# Altium PCB HARSH_Payload.PcbDoc (part 1 of 2)
Units mil, origin at the board's own origin, x right, y up, seen from the top; angles counter-clockwise.
Board outline 2500 x 1712.6 mil, 6 copper layers (Top-Outer-Layer (GND), Top-Mid-Layer Signal, Inner-Layer (GND), Inner-Layer (VCC), Bottom-Mid-Layer Signal, Bottom-Outer-Layer (GND)), stack 62.896 mil thick; 77 components, 30 nets, 807 pads, 301 vias.
Unrouted connection lines stored in the file: 3.
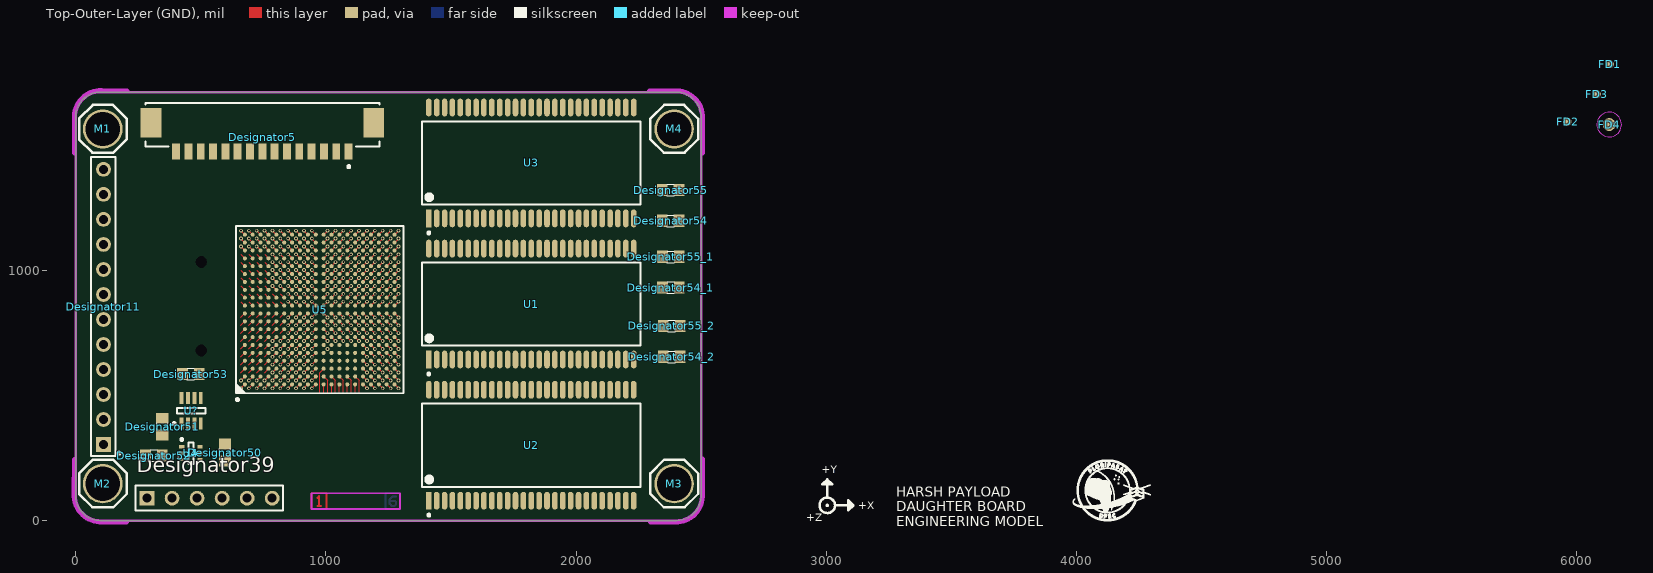
[diagram p0: Top-Outer-Layer (GND) view]
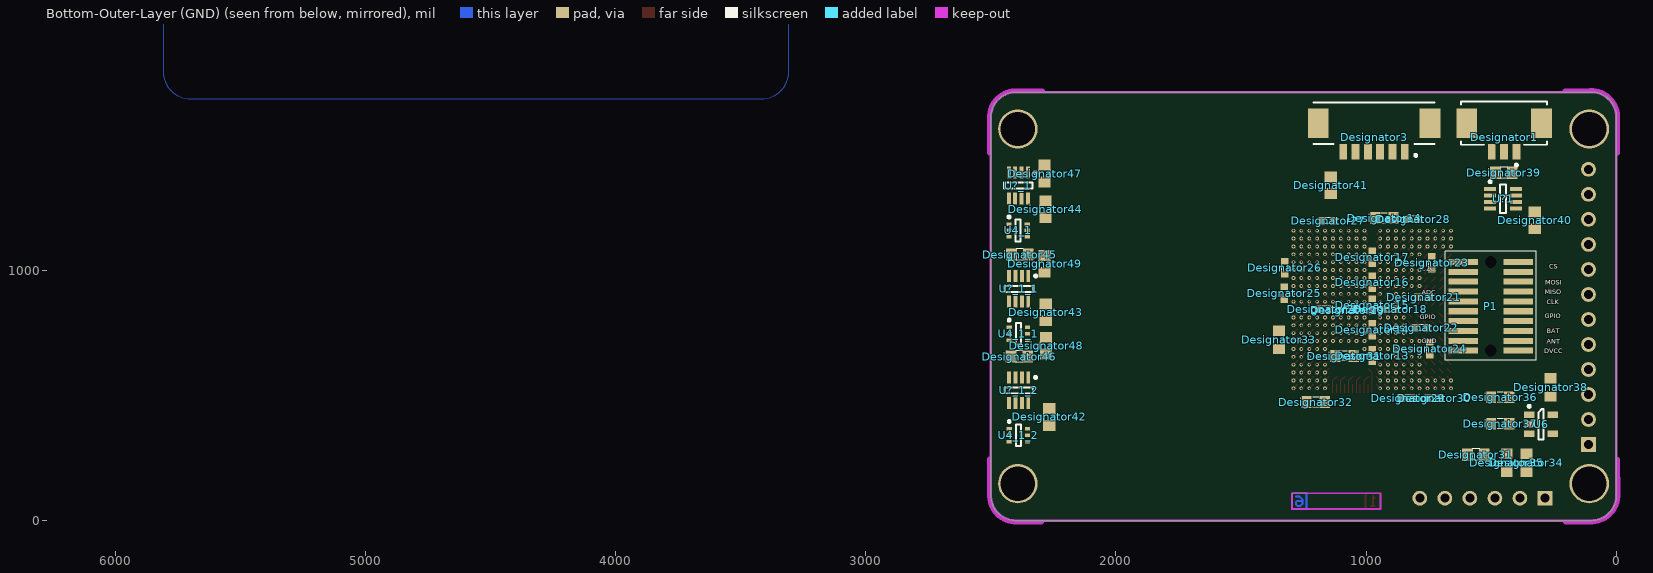
[diagram p1: Bottom-Outer-Layer (GND) view, seen from below]
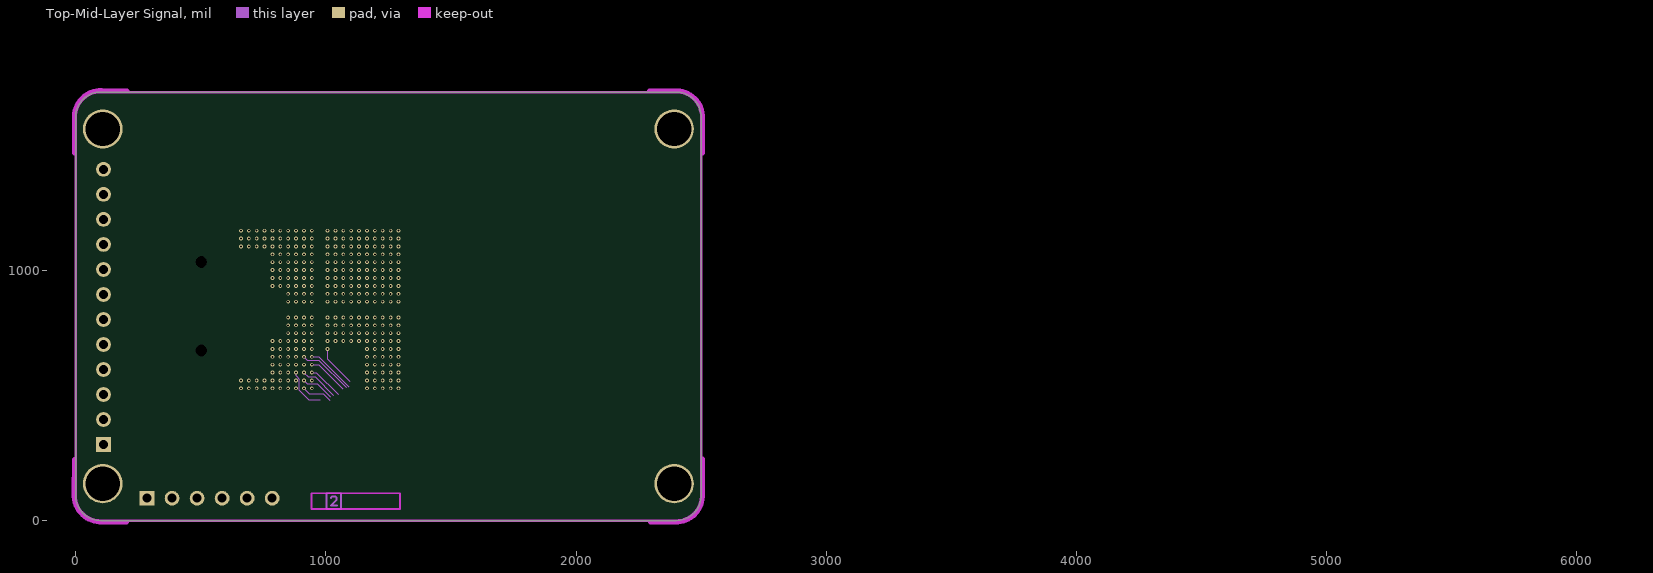
[diagram p2: Top-Mid-Layer Signal]
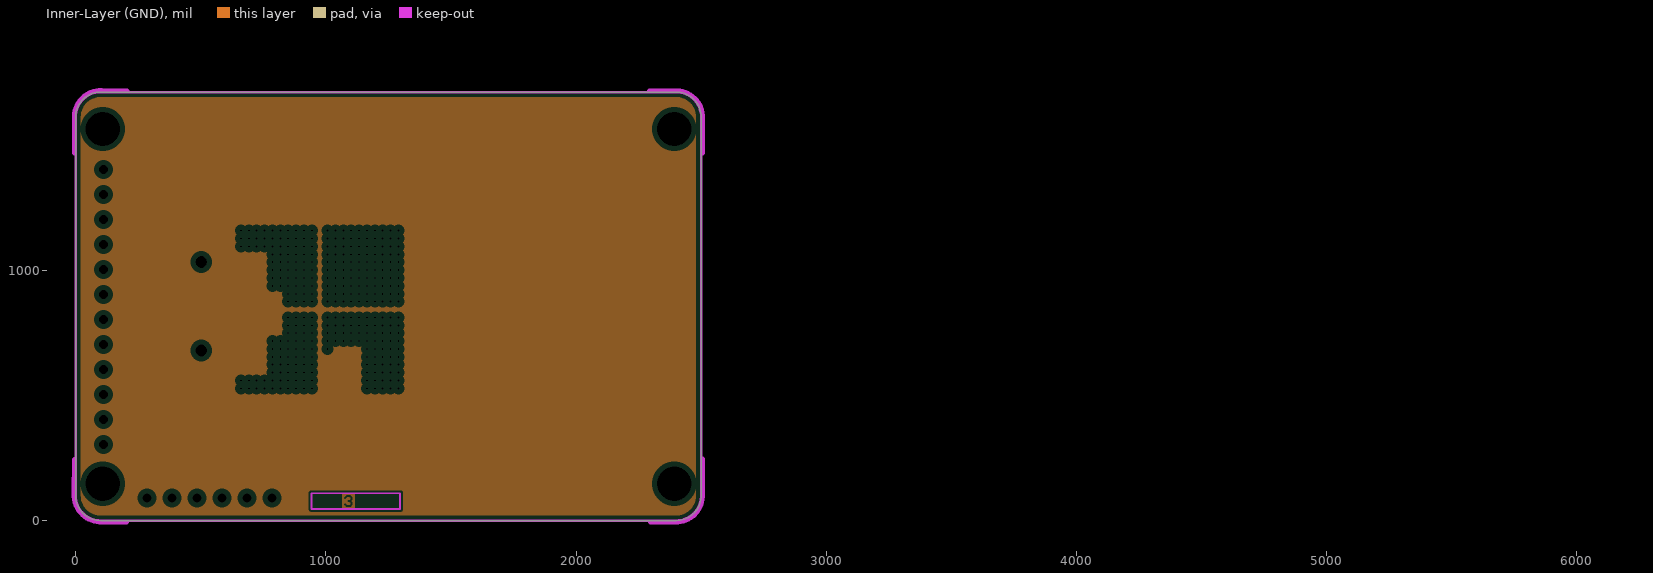
[diagram p3: Inner-Layer (GND), clearances drawn from the general rule]
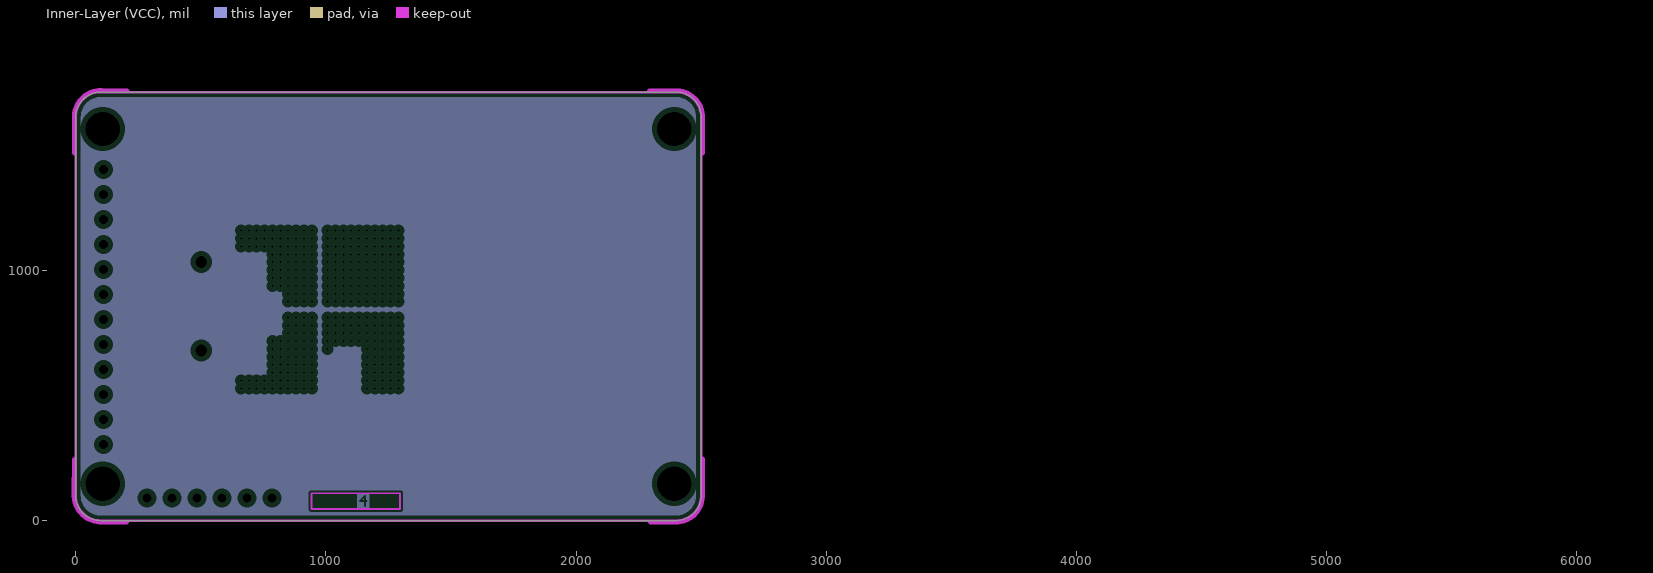
[diagram p4: Inner-Layer (VCC), clearances drawn from the general rule]
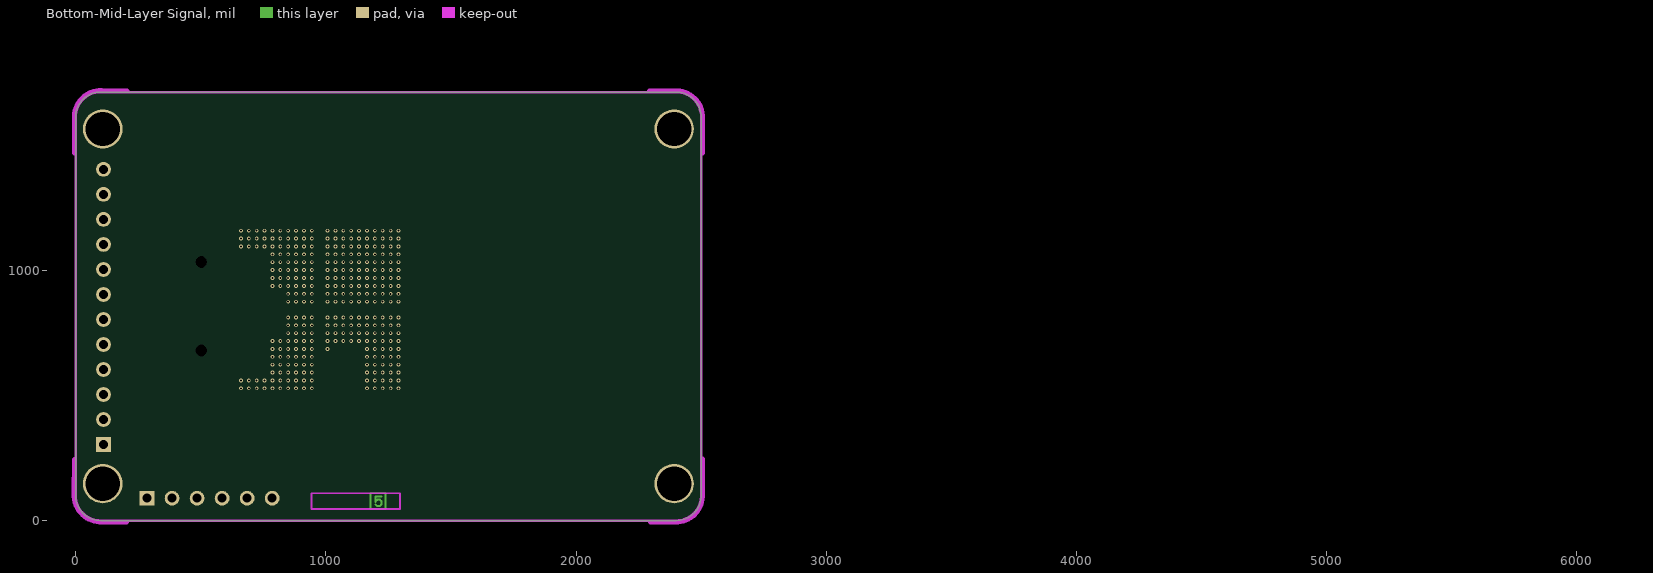
[diagram p5: Bottom-Mid-Layer Signal]
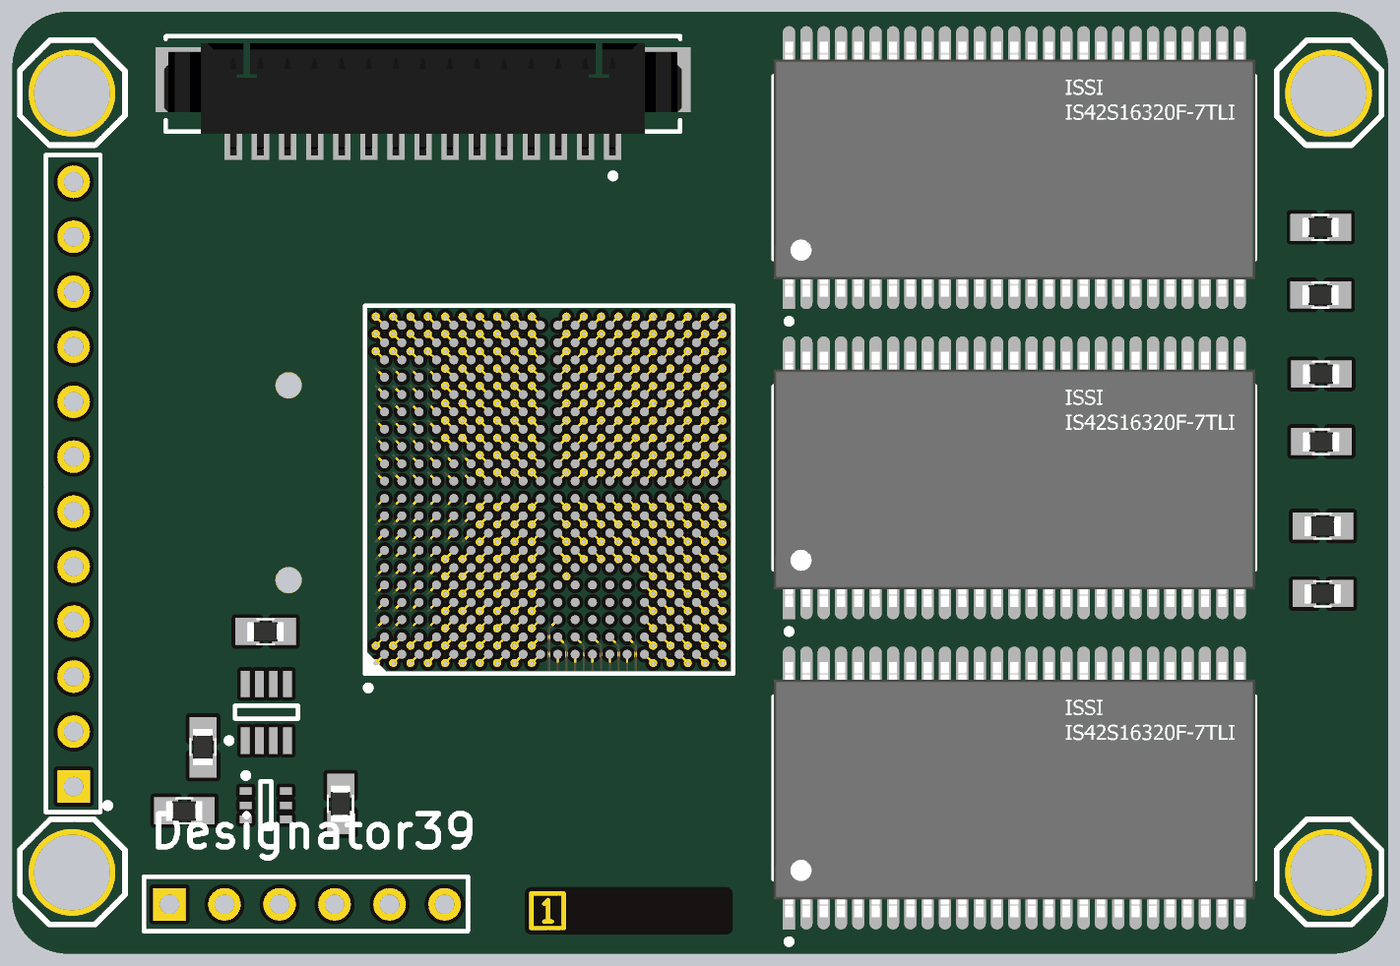
[diagram p7: 3D render of the assembled board from above, using the file's embedded part models]
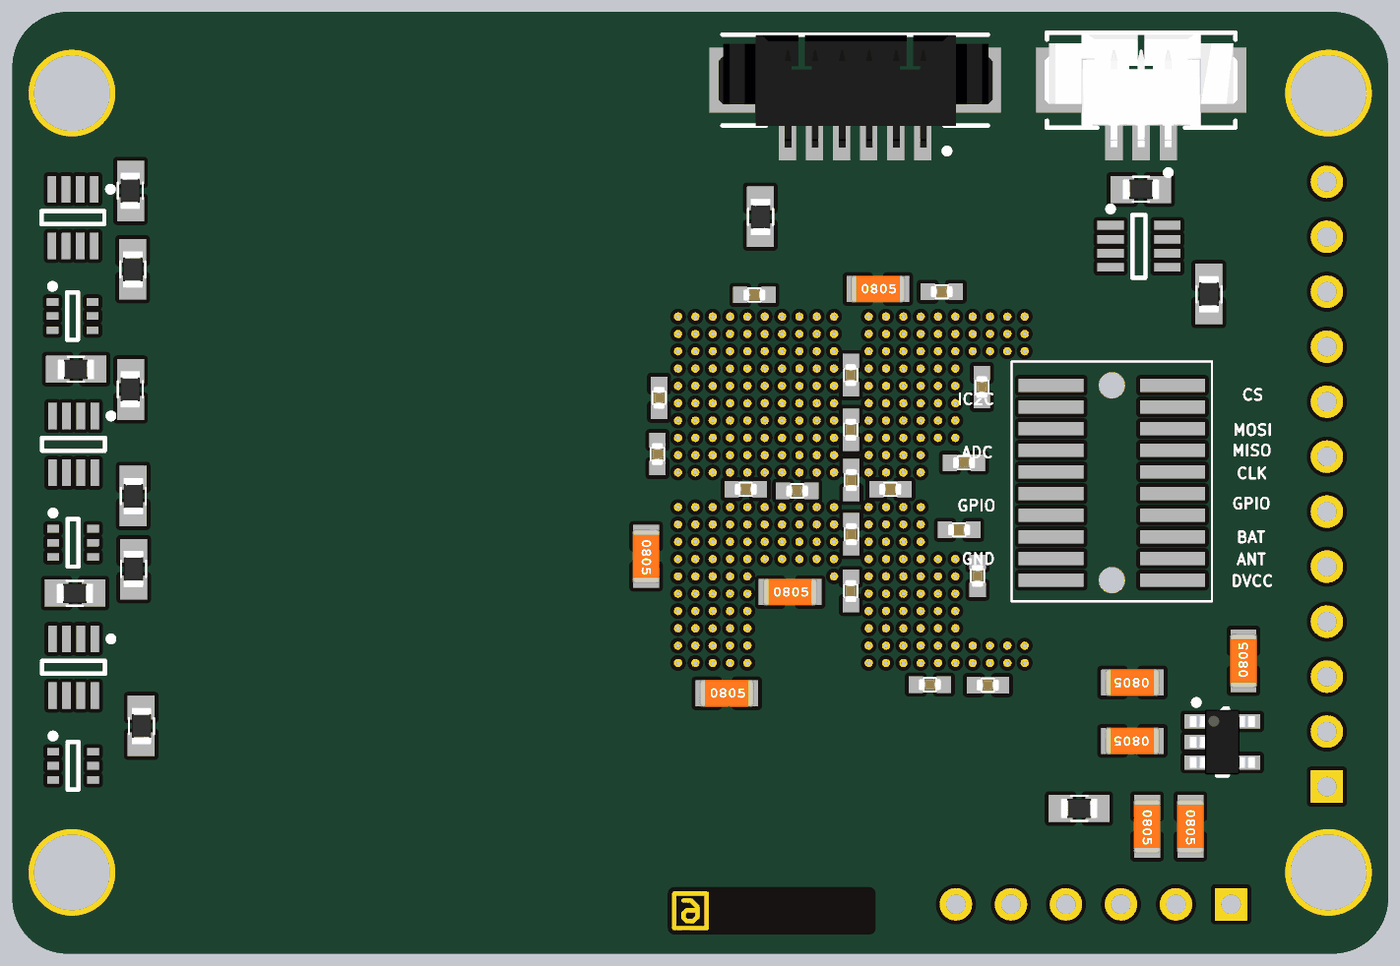
[diagram p8: 3D render of the assembled board from below, using the file's embedded part models]

## Layer stack, top to bottom
Top Solder: solder mask 0.4, Solder Resist, Dk 3.5
Top-Outer-Layer (GND): signal copper 1.378
Dielectric 1: prepreg 3.937, FR-4, Dk 4.2
Top-Mid-Layer Signal: signal copper 0.689
Dielectric 4: core 22.2441, Dk 4.2
Inner-Layer (GND): plane copper 0.689
Dielectric3: prepreg 5, FR-4, Dk 4.2
Inner-Layer (VCC): plane copper 0.689
Dielectric 5: core 22.2441, Dk 4.2
Bottom-Mid-Layer Signal: signal copper 0.689
Dielectric2: prepreg 3.937, FR-4, Dk 4.2
Bottom-Outer-Layer (GND): signal copper 1.4
Bottom Solder: solder mask 0.4, Solder Resist, Dk 3.5

## Board outline
100,-0.98 cw(c100,99.02) 0,99.02 0,109.25 0,1607.28 0,1611.61 cw(c100,1611.61) 100,1711.61 104.33,1711.61 2389.76,1711.61 2400,1711.61 cw(c2400,1611.61) 2500,1611.61 2500,1601.38 2500,109.25 2500,99.02 cw(c2400,99.02) 2400,-0.98

## Design rules (kind name [scope] priority, off if disabled: settings)
Clearance Clearance_BGA [WithinRoom('BGA')] p1: gap=4 ignorepadtopadclearanceinfootprint=FALSE
Clearance Clearance_1 [(ObjectKind = 'Pad') And (AsMM(X1) = 60.75) And (AsMM(Y1) = 39.75)] p2: gap=10 ignorepadtopadclearanceinfootprint=FALSE except(0: Arc-Hole Track-Hole SMDPad-Hole THPad-Hole Via-Hole Fill-Hole Poly-Hole Region-Hole Text-Hole)
Clearance Clearance_6 [InNet('GND')] p3: gap=15 ignorepadtopadclearanceinfootprint=FALSE except(0: Arc-Hole Track-Hole SMDPad-Hole THPad-Hole Via-Hole Fill-Hole Poly-Hole Region-Hole Text-Hole; 6: THPad-THPad; 7: Arc-SMDPad Arc-THPad Track-SMDPad Track-THPad SMDPad-SMDPad; 10: SMDPad-Fill SMDPad-Poly SMDPad-Region; 20: Arc-Arc Arc-Track Arc-Text Track-Track Track-Text SMDPad-Text Fill-Fill Fill-Poly Fill-Region Fill-Text Poly-Poly Poly-Region Poly-Text Region-Region Region-Text Text-Text)
Clearance [All] p4: gap=7 ignorepadtopadclearanceinfootprint=FALSE except(0: Arc-Hole Track-Hole SMDPad-Hole THPad-Hole Via-Hole Fill-Hole Poly-Hole Region-Hole Text-Hole)
DiffPairsRouting DiffPairsRouting_1 [InDifferentialPair('XT2')] p1: maxlimit=10 minlimit=10 mostfreqgap=10 toplayer_minwidth=10 toplayer_maxwidth=10 toplayer_prefwidth=10 midlayer1_minwidth=10 midlayer1_maxwidth=10 midlayer1_prefwidth=10 midlayer2_minwidth=10 midlayer2_maxwidth=10 midlayer2_prefwidth=10 bottomlayer_minwidth=10 bottomlayer_maxwidth=10 bottomlayer_prefwidth=10 maxuncoupledlength=500
DiffPairsRouting [All] p2: maxlimit=6 minlimit=6 mostfreqgap=6 toplayer_minwidth=18 toplayer_maxwidth=18 toplayer_prefwidth=18 midlayer1_minwidth=18 midlayer1_maxwidth=18 midlayer1_prefwidth=18 midlayer2_minwidth=18 midlayer2_maxwidth=18 midlayer2_prefwidth=18 bottomlayer_minwidth=18 bottomlayer_maxwidth=18 bottomlayer_prefwidth=18 maxuncoupledlength=500
FanoutControl Fanout_BGA [IsBGA] p1: bgadir=Out bgaviamode=Centered fanoutstyle=BGA fanoutdirection=Alternating viagrid=1 // Fanout_BGA (Default Rule)
HoleSize [All] p1: absolutevalues=TRUE maxlimit=200 minlimit=1 maxpercent=80.000 minpercent=20.000
MinimumSolderMaskSliver [All] p1: minsoldermaskwidth=0
PlaneClearance [All] p1: clearance=20
PlaneConnect [InNetClass('power')] p1: planeconnectstyle=Direct reliefexpansion=20 reliefentries=4 reliefconductorwidth=10 reliefairgap=10
PlaneConnect PlaneConnect_1 [All] p2: planeconnectstyle=Relief reliefexpansion=20 reliefentries=4 reliefconductorwidth=10 reliefairgap=10
PolygonConnect PolygonConnect_GDN_Mechole [(ObjectKind = 'Pad') And (AsMM(X1) = 60.75) And (AsMM(Y1) = 39.725) And (Component = 'M4')] p1: connectstyle=Direct reliefconductorwidth=10 reliefentries=4 polygonreliefangle="90 Angle" airgapwidth=10
PolygonConnect PolygonConnect_GND_pads [(ObjectKind = 'Pad') And (Net = 'GND')] p2: connectstyle=Relief reliefconductorwidth=10 reliefentries=4 polygonreliefangle="90 Angle" airgapwidth=10
RoomDefinition BGA [False] p1: confinementstyle=ConfineIn formatcopy=TRUE lockcomponents=FALSE outline 580.71,1255.91 1350.39,1255.91 1350.39,434.06 580.71,434.06
RoutingVias RoutingVias_BGA [WithinRoom('BGA')] p1: holewidth=8 width=15 viastyle="Through Hole" minholewidth=8 minwidth=15 maxholewidth=8 maxwidth=15
RoutingVias [All] p2: holewidth=10 width=20 viastyle="Through Hole" minholewidth=5 minwidth=10 maxholewidth=10 maxwidth=25
SilkToSilkClearance [All] p1: silktosilkclearance=5
SilkToSolderMaskClearance [IsPad] p1: minsilkscreentomaskgap=0 clearancetoexposedcopper=TRUE
SolderMaskExpansion [All] p1: expansion=7
Width Width_BGA [WithinRoom('BGA')] p1: maxlimit=4 minlimit=4 preferedwidth=4
Width Width_Power [InNetClass('Power')] p2: maxlimit=30 minlimit=20 preferedwidth=20
Width [All] p3: maxlimit=70 minlimit=5 preferedwidth=10
22 further rules are at their usual default settings.

## Classes and differential pairs
component class 0_Architecture: FD1 FD2 FD3 M1 M2 M3 M4
component class "OBDH 2.0 to DB_Memory interface connector": P1

## Components (designator, comment, footprint, x,y, rotation, side; value= is the part's Value field where it differs from the comment)
Designator1 "Comment" Molex_0_MFG 448.82,1587.6 r0 bottom
Designator3 "Comment" Molex_53261-0671_0 968.5,1587.6 r0 bottom
Designator5 "Comment" Molex_53261-1571_0 746.06,1580.71 r180 top
Designator11 "Comment" HDR1X12H 111.22,302.76 r90 top
Designator13 "Comment" 0402M 976.38,658.46 r270 bottom
Designator14 "Comment" CC0805 927.17,1207.68 r180 bottom
Designator14 "Comment" 0402M 975.39,761.81 r270 bottom
Designator15 "Comment" 0402M 975.39,860.24 r270 bottom
Designator16 "Comment" 0402M 976.38,951.77 r270 bottom
Designator17 "Comment" 0402M 976.38,1051.18 r270 bottom
Designator18 "Comment" 0402M 904.53,843.5 r0 bottom
Designator19 "Comment" 0402M 1073.82,840.55 r0 bottom
Designator20 "Comment" 0402M 1167.32,843.5 r0 bottom
Designator21 "Comment" 0402M 770.67,891.73 r0 bottom
Designator22 "Comment" 0402M 779.53,769.68 r0 bottom
Designator23 "Comment" 0402M 738.19,1029.53 r90 bottom
Designator24 "Comment" 0402M 746.06,686.02 r90 bottom
Designator25 "Comment" 0402M 1327.76,907.48 r90 bottom
Designator26 "Comment" 0402M 1324.8,1009.84 r90 bottom
Designator27 "Comment" 0402M 1151.57,1196.85 r180 bottom
Designator28 "Comment" 0402M 811.02,1202.76 r180 bottom
Designator29 "Comment" 0402M 832.68,488.19 r180 bottom
Designator30 "Comment" 0402M 727.36,487.2 r180 bottom
Designator31 "Comment" "0603 res" 551.18,262.8 r180 bottom
Designator31 "Comment" CC0805 1086.61,656.5 r180 bottom
Designator32 "Comment" CC0805 1201.77,472.44 r180 bottom
Designator33 "Comment" CC0805 1348.43,721.46 r270 bottom
Designator34 "Comment" CC0805 359.25,230.32 r270 bottom
Designator35 "Comment" CC0805 437.99,230.32 r270 bottom
Designator36 "Comment" CC0805 464.57,492.13 r0 bottom
Designator37 "Comment" CC0805 464.57,385.83 r0 bottom
Designator38 "Comment" CC0805 262.8,531.5 r90 bottom
Designator39 "Comment" HDR1X6H 285.43,88.58 r0 top
Designator39 "Comment" "0603 res" 438.98,1388.78 r180 bottom
Designator40 "Comment" "0603 res" 325.79,1187.99 r270 bottom
Designator41 "Comment" "0603 res" 1140.75,1328.74 r270 bottom
Designator42 "Comment" "0603 res" 2265.75,402.56 r270 bottom
Designator43 "Comment" "0603 res" 2280.51,820.87 r270 bottom
Designator44 "Comment" "0603 res" 2281.5,1233.27 r270 bottom
Designator45 "Comment" "0603 res" 2394.68,1062.01 r0 bottom
Designator46 "Comment" "0603 res" 2396.65,654.53 r0 bottom
Designator47 "Comment" "0603 res" 2285.43,1396.65 r90 bottom
Designator48 "Comment" "0603 res" 2279.53,708.66 r90 bottom
Designator49 "Comment" "0603 res" 2285.43,1035.43 r90 bottom
Designator50 "Comment" "0603 res" 596.46,281.5 r90 top
Designator51 "Comment" "0603 res" 346.46,384.84 r90 top
Designator52 "Comment" "0603 res" 302.17,258.86 r180 top
Designator53 "Comment" "0603 res" 449.8,584.65 r180 top
Designator54 "Comment" "0603 res" 2367.13,1196.85 r180 top
Designator54_1 "Comment" "0603 res" 2368.11,930.12 r180 top
Designator54_2 "Comment" "0603 res" 2371.06,653.54 r180 top
Designator55 "Comment" "0603 res" 2367.13,1319.88 r180 top
Designator55_1 "Comment" "0603 res" 2368.11,1053.15 r180 top
Designator55_2 "Comment" "0603 res" 2371.06,776.57 r180 top
FD1 "Fiducial" "FIDUCIAL 1.3MM" 6131.89,1822.83 r0 top
FD2 "Fiducial" "FIDUCIAL 1.3MM" 5962.6,1592.52 r0 top
FD3 "Fiducial" "FIDUCIAL 1.3MM" 6079.72,1703.74 r0 top
FD4 "Fiducial 1.3" "Fiducial 1.3mm" 6128.94,1581.69 r270 top (schematic designator FD3)
M1 "DB Mechanical Hole" "DB MECHANICAL HOLE" 108.27,1563.98 r0 top
M2 "DB Mechanical Hole" "DB MECHANICAL HOLE" 108.27,146.65 r0 top
M3 "DB Mechanical Hole" "DB MECHANICAL HOLE" 2391.73,146.65 r0 top
M4 "DB Mechanical Hole" "DB MECHANICAL HOLE" 2391.73,1563.98 r0 top
P1 "FSI-110-03-G-D-AD" "MATING FSI-110-03-G-D-AD" 501.97,855.31 r0 top
U1 "IS42S16320F-7TLI" ISSI_TSOP-54-22.22000X10.16000_IPC_A 1820.79,864.3 r90 top
U2 "IS42S16320F-7TLI" ISSI_TSOP-54-22.22000X10.16000_IPC_A 1820.79,300.2 r90 top
U3 "IS42S16320F-7TLI" ISSI_TSOP-54-22.22000X10.16000_IPC_A 1820.79,1428.4 r90 top
U4 "SI1416EDH-T1-GE3" NXP-SOT363_N 460.63,268.7 r0 top
U4_1 "SI1416EDH-T1-GE3" NXP-SOT363_N 2390.75,1158.46 r180 bottom (schematic designator U4)
U4_1_1 "SI1416EDH-T1-GE3" NXP-SOT363_N 2389.76,746.06 r180 bottom (schematic designator U4)
U4_1_2 "SI1416EDH-T1-GE3" NXP-SOT363_N 2389.76,340.55 r180 bottom (schematic designator U4)
U5 "M2S010-VF400" MCSM-VF-400 975.39,842.52 r90 top (schematic designator U4)
U6 "TLV62565DBVR" SOT23-5 301.18,383.86 r180 bottom
U? "LTC4361ITS8-1#TRMPBF" LT-TS8-8-TSOT-23_V 461.61,437.99 r90 top
U?1 "LTC4361ITS8-1#TRMPBF" LT-TS8-8-TSOT-23_V 452.76,1285.43 r180 bottom (schematic designator U?)
U?_1 "LTC4361ITS8-1#TRMPBF" LT-TS8-8-TSOT-23_V 2389.76,1337.6 r270 bottom (schematic designator U?)
U?_1_1 "LTC4361ITS8-1#TRMPBF" LT-TS8-8-TSOT-23_V 2388.78,925.2 r270 bottom (schematic designator U?)
U?_1_2 "LTC4361ITS8-1#TRMPBF" LT-TS8-8-TSOT-23_V 2388.78,519.69 r270 bottom (schematic designator U?)

## Footprints (in the part's own frame and the unit in brackets; to place one, negate y for a bottom-side part, rotate by r counter-clockwise, add the part's x,y. Pads: shape width x height; smd on the part's side, far side on the other; paste and mask are expansions set on the pad)
0402M [mil] "0402M"
  rect 26x30 smd: 1(-25.59,0) 2(25.59,0)
  silkscreen extent -11,-12 11,12, body extent -21,-11 21,11, height 22
"0603 res" [mm] "0603 Res"
  rect 1.1x1.25 smd: 1(-1.118,-0.002) 2(0.583,-0.002)
  silkscreen extent -0.63,-0.57 0.12,0.59, body extent -1.11,-0.44 0.59,0.46, height 0.54
CC0805 [mm] "TDK mlccspec_commercial_general_midvoltage_en.pdf"
  rect 1.05x1.2 smd: 1(-0.925,0) 2(0.925,0)
  silkscreen extent -0.3,-0.5 0.3,0.5, body extent -1.25,-0.62 1.25,0.62, height 0.78
"DB MECHANICAL HOLE" [mm]
  round 4 hole 3.5 mask+0: 0(0,0)
"FIDUCIAL 1.3MM" [mil]
  round 32 smd: 1(0,0)
  Top-Outer-Layer (GND) pour cut-out: -48.23,-6.89 -45.31,17.58 -30.69,37.43 -8.18,47.47 16.35,45.09 36.52,30.91 47.05,8.63 45.22,-15.95 31.5,-36.42 31.5,-36.42 8.41,-46.85 -16.81,-44.45 -37.51,-29.85 -48.23,-6.89
  Top-Outer-Layer (GND) pour cut-out: 0.19,48.23
"Fiducial 1.3mm" [mm]
  round 1.3 smd mask+0.6: FD0(0,0)
  Top-Outer-Layer (GND) keep-out circle w0.1: c0,0 r1.25
HDR1X6H [mm] "Connector; Header; 6 Position; Right Angle"
  rect 1.5x1.5 hole 0.9: 1(0,0)
  round 1.5 hole 0.9: 2(2.54,0) 3(5.08,0) 4(7.62,0) 5(10.16,0) 6(12.7,0)
  silkscreen extent -1.18,-1.24 13.78,1.28
HDR1X12H [mm] "Connector; Header; 12 Position; Right Angle"
  rect 1.5x1.5 hole 0.9: 1(0,0)
  round 1.5 hole 0.9: 2(2.54,0) 3(5.08,0) 4(7.62,0) 5(10.16,0) 6(12.7,0) 7(15.24,0) 8(17.78,0) 9(20.32,0) 10(22.86,0) 11(25.4,0) 12(27.94,0)
  silkscreen extent -1.18,-1.7 29.17,1.28
ISSI_TSOP-54-22.22000X10.16000_IPC_A [mm]
  rect 1.806x0.566 smd paste+0 mask+0: 1(-5.63,10.4)
  rrect100% 1.806x0.566 smd paste+0 mask+0: 2(-5.63,9.6) 3(-5.63,8.8) 4(-5.63,8) 5(-5.63,7.2) 6(-5.63,6.4) 7(-5.63,5.6) 8(-5.63,4.8) 9(-5.63,4) 10(-5.63,3.2) 11(-5.63,2.4) 12(-5.63,1.6) 13(-5.63,0.8) 14(-5.63,0) 15(-5.63,-0.8) 16(-5.63,-1.6) 17(-5.63,-2.4) 18(-5.63,-3.2) 19(-5.63,-4) 20(-5.63,-4.8) 21(-5.63,-5.6) 22(-5.63,-6.4) 23(-5.63,-7.2) 24(-5.63,-8) 25(-5.63,-8.8) 26(-5.63,-9.6) 27(-5.63,-10.4) 28(5.63,-10.4) 29(5.63,-9.6) 30(5.63,-8.8) 31(5.63,-8) 32(5.63,-7.2) 33(5.63,-6.4) 34(5.63,-5.6) 35(5.63,-4.8) 36(5.63,-4) 37(5.63,-3.2) 38(5.63,-2.4) 39(5.63,-1.6) 40(5.63,-0.8) 41(5.63,0) 42(5.63,0.8) 43(5.63,1.6) 44(5.63,2.4) 45(5.63,3.2) 46(5.63,4) 47(5.63,4.8) 48(5.63,5.6) 49(5.63,6.4) 50(5.63,7.2) 51(5.63,8) 52(5.63,8.8) 53(5.63,9.6) 54(5.63,10.4)
  silkscreen extent -7.22,-11.11 4.23,11.11, body extent -7.03,-11.61 7.03,11.61, height 0.25
LT-TS8-8-TSOT-23_V [mm] "SOT23, 8-Leads, Body 2.9x1.75mm, Pitch 0.65mm"
  rect 1.22x0.4 smd: 1(-1.31,0.975) 2(-1.31,0.325) 3(-1.31,-0.325) 4(-1.31,-0.975) 5(1.31,-0.975) 6(1.31,-0.325) 7(1.31,0.325) 8(1.31,0.975)
  silkscreen extent -1.43,-1.45 0.3,1.85, body extent -0.87,-1.45 0.88,1.45, height 1
"MATING FSI-110-03-G-D-AD" [mm]
  rect 3x0.61 smd far side: 1(-2.8,-4.5) 2(2.8,-4.5) 3(-2.8,-3.5) 4(2.8,-3.5) 5(-2.8,-2.5) 6(2.8,-2.5) 7(-2.8,-1.5) 8(2.8,-1.5) 9(-2.8,-0.5) 10(2.8,-0.5) 11(-2.8,0.5) 12(2.8,0.5) 13(-2.8,1.5) 14(2.8,1.5) 15(-2.8,2.5) 16(2.8,2.5) 17(-2.8,3.5) 18(2.8,3.5) 19(-2.8,4.5) 20(2.8,4.5)
  round 0 hole 1.2: AT(0,-4.5) AT(0,4.5)
MCSM-VF-400 [mm] "BGA, 400-Balls, Body 17x17mm, Pitch 0.8mm"
  round 0.41 smd: A1(-7.6,7.6) A2(-6.8,7.6) A3(-6,7.6) A4(-5.2,7.6) A5(-4.4,7.6) A6(-3.6,7.6) A7(-2.8,7.6) A8(-2,7.6) A9(-1.2,7.6) A10(-0.4,7.6) A11(0.4,7.6) A12(1.2,7.6) A13(2,7.6) A14(2.8,7.6) A15(3.6,7.6) A16(4.4,7.6) A17(5.2,7.6) A18(6,7.6) A19(6.8,7.6) A20(7.6,7.6) B1(-7.6,6.8) B2(-6.8,6.8) B3(-6,6.8) B4(-5.2,6.8) B5(-4.4,6.8) B6(-3.6,6.8) B7(-2.8,6.8) B8(-2,6.8) B9(-1.2,6.8) B10(-0.4,6.8) B11(0.4,6.8) B12(1.2,6.8) B13(2,6.8) B14(2.8,6.8) B15(3.6,6.8) B16(4.4,6.8) B17(5.2,6.8) B18(6,6.8) B19(6.8,6.8) B20(7.6,6.8) C1(-7.6,6) C2(-6.8,6) C3(-6,6) C4(-5.2,6) C5(-4.4,6) C6(-3.6,6) C7(-2.8,6) C8(-2,6) C9(-1.2,6) C10(-0.4,6) C11(0.4,6) C12(1.2,6) C13(2,6) C14(2.8,6) C15(3.6,6) C16(4.4,6) C17(5.2,6) C18(6,6) C19(6.8,6) C20(7.6,6) D1(-7.6,5.2) D2(-6.8,5.2) D3(-6,5.2) D4(-5.2,5.2) D5(-4.4,5.2) D6(-3.6,5.2) D7(-2.8,5.2) D8(-2,5.2) D9(-1.2,5.2) D10(-0.4,5.2) D11(0.4,5.2) D12(1.2,5.2) D13(2,5.2) D14(2.8,5.2) D15(3.6,5.2) D16(4.4,5.2) D17(5.2,5.2) D18(6,5.2) D19(6.8,5.2) D20(7.6,5.2) E1(-7.6,4.4) E2(-6.8,4.4) E3(-6,4.4) E4(-5.2,4.4) E5(-4.4,4.4) E6(-3.6,4.4) E7(-2.8,4.4) E8(-2,4.4) E9(-1.2,4.4) E10(-0.4,4.4) E11(0.4,4.4) E12(1.2,4.4) E13(2,4.4) E14(2.8,4.4) E15(3.6,4.4) E16(4.4,4.4) E17(5.2,4.4) E18(6,4.4) E19(6.8,4.4) E20(7.6,4.4) F1(-7.6,3.6) F2(-6.8,3.6) F3(-6,3.6) F4(-5.2,3.6) F5(-4.4,3.6) F6(-3.6,3.6) F7(-2.8,3.6) F8(-2,3.6) F9(-1.2,3.6) F10(-0.4,3.6) F11(0.4,3.6) F12(1.2,3.6) F13(2,3.6) F14(2.8,3.6) F15(3.6,3.6) F16(4.4,3.6) F17(5.2,3.6) F18(6,3.6) F19(6.8,3.6) F20(7.6,3.6) G1(-7.6,2.8) G2(-6.8,2.8) G3(-6,2.8) G4(-5.2,2.8) G5(-4.4,2.8) G6(-3.6,2.8) G7(-2.8,2.8) G8(-2,2.8) G9(-1.2,2.8) G10(-0.4,2.8) G11(0.4,2.8) G12(1.2,2.8) G13(2,2.8) G14(2.8,2.8) G15(3.6,2.8) G16(4.4,2.8) G17(5.2,2.8) G18(6,2.8) G19(6.8,2.8) G20(7.6,2.8) H1(-7.6,2) H2(-6.8,2) H3(-6,2) H4(-5.2,2) H5(-4.4,2) H6(-3.6,2) H7(-2.8,2) H8(-2,2) H9(-1.2,2) H10(-0.4,2) H11(0.4,2) H12(1.2,2) H13(2,2) H14(2.8,2) H15(3.6,2) H16(4.4,2) H17(5.2,2) H18(6,2) H19(6.8,2) H20(7.6,2) J1(-7.6,1.2) J2(-6.8,1.2) J3(-6,1.2) J4(-5.2,1.2) J5(-4.4,1.2) J6(-3.6,1.2) J7(-2.8,1.2) J8(-2,1.2) J9(-1.2,1.2) J10(-0.4,1.2) J11(0.4,1.2) J12(1.2,1.2) J13(2,1.2) J14(2.8,1.2) J15(3.6,1.2) J16(4.4,1.2) J17(5.2,1.2) J18(6,1.2) J19(6.8,1.2) J20(7.6,1.2) K1(-7.6,0.4) K2(-6.8,0.4) K3(-6,0.4) K4(-5.2,0.4) K5(-4.4,0.4) K6(-3.6,0.4) K7(-2.8,0.4) K8(-2,0.4) K9(-1.2,0.4) K10(-0.4,0.4) K11(0.4,0.4) K12(1.2,0.4) K13(2,0.4) K14(2.8,0.4) K15(3.6,0.4) K16(4.4,0.4) K17(5.2,0.4) K18(6,0.4) K19(6.8,0.4) K20(7.6,0.4) L1(-7.6,-0.4) L2(-6.8,-0.4) L3(-6,-0.4) L4(-5.2,-0.4) L5(-4.4,-0.4) L6(-3.6,-0.4) L7(-2.8,-0.4) L8(-2,-0.4) L9(-1.2,-0.4) L10(-0.4,-0.4) L11(0.4,-0.4) L12(1.2,-0.4) L13(2,-0.4) L14(2.8,-0.4) L15(3.6,-0.4) L16(4.4,-0.4) L17(5.2,-0.4) L18(6,-0.4) L19(6.8,-0.4) L20(7.6,-0.4) M1(-7.6,-1.2) M2(-6.8,-1.2) M3(-6,-1.2) M4(-5.2,-1.2) M5(-4.4,-1.2) M6(-3.6,-1.2) M7(-2.8,-1.2) M8(-2,-1.2) M9(-1.2,-1.2) M10(-0.4,-1.2) M11(0.4,-1.2) M12(1.2,-1.2) M13(2,-1.2) M14(2.8,-1.2) M15(3.6,-1.2) M16(4.4,-1.2) M17(5.2,-1.2) M18(6,-1.2) M19(6.8,-1.2) M20(7.6,-1.2) N1(-7.6,-2) N2(-6.8,-2) N3(-6,-2) N4(-5.2,-2) N5(-4.4,-2) N6(-3.6,-2) N7(-2.8,-2) N8(-2,-2) N9(-1.2,-2) N10(-0.4,-2) N11(0.4,-2) N12(1.2,-2) N13(2,-2) N14(2.8,-2) N15(3.6,-2) N16(4.4,-2) N17(5.2,-2) N18(6,-2) N19(6.8,-2) N20(7.6,-2) P1(-7.6,-2.8) P2(-6.8,-2.8) P3(-6,-2.8) P4(-5.2,-2.8) P5(-4.4,-2.8) P6(-3.6,-2.8) P7(-2.8,-2.8) P8(-2,-2.8) P9(-1.2,-2.8) P10(-0.4,-2.8) P11(0.4,-2.8) P12(1.2,-2.8) P13(2,-2.8) P14(2.8,-2.8) P15(3.6,-2.8) P16(4.4,-2.8) P17(5.2,-2.8) P18(6,-2.8) P19(6.8,-2.8) P20(7.6,-2.8) R1(-7.6,-3.6) R2(-6.8,-3.6) R3(-6,-3.6) R4(-5.2,-3.6) R5(-4.4,-3.6) R6(-3.6,-3.6) R7(-2.8,-3.6) R8(-2,-3.6) R9(-1.2,-3.6) R10(-0.4,-3.6) R11(0.4,-3.6) R12(1.2,-3.6) R13(2,-3.6) R14(2.8,-3.6) R15(3.6,-3.6) R16(4.4,-3.6) R17(5.2,-3.6) R18(6,-3.6) R19(6.8,-3.6) R20(7.6,-3.6) T1(-7.6,-4.4) T2(-6.8,-4.4) T3(-6,-4.4) T4(-5.2,-4.4) T5(-4.4,-4.4) T6(-3.6,-4.4) T7(-2.8,-4.4) T8(-2,-4.4) T9(-1.2,-4.4) T10(-0.4,-4.4) T11(0.4,-4.4) T12(1.2,-4.4) T13(2,-4.4) T14(2.8,-4.4) T15(3.6,-4.4) T16(4.4,-4.4) T17(5.2,-4.4) T18(6,-4.4) T19(6.8,-4.4) T20(7.6,-4.4) U1(-7.6,-5.2) U2(-6.8,-5.2) U3(-6,-5.2) U4(-5.2,-5.2) U5(-4.4,-5.2) U6(-3.6,-5.2) U7(-2.8,-5.2) U8(-2,-5.2) U9(-1.2,-5.2) U10(-0.4,-5.2) U11(0.4,-5.2) U12(1.2,-5.2) U13(2,-5.2) U14(2.8,-5.2) U15(3.6,-5.2) U16(4.4,-5.2) U17(5.2,-5.2) U18(6,-5.2) U19(6.8,-5.2) U20(7.6,-5.2) V1(-7.6,-6) V2(-6.8,-6) V3(-6,-6) V4(-5.2,-6) V5(-4.4,-6) V6(-3.6,-6) V7(-2.8,-6) V8(-2,-6) V9(-1.2,-6) V10(-0.4,-6) V11(0.4,-6) V12(1.2,-6) V13(2,-6) V14(2.8,-6) V15(3.6,-6) V16(4.4,-6) V17(5.2,-6) V18(6,-6) V19(6.8,-6) V20(7.6,-6) W1(-7.6,-6.8) W2(-6.8,-6.8) W3(-6,-6.8) W4(-5.2,-6.8) W5(-4.4,-6.8) W6(-3.6,-6.8) W7(-2.8,-6.8) W8(-2,-6.8) W9(-1.2,-6.8) W10(-0.4,-6.8) W11(0.4,-6.8) W12(1.2,-6.8) W13(2,-6.8) W14(2.8,-6.8) W15(3.6,-6.8) W16(4.4,-6.8) W17(5.2,-6.8) W18(6,-6.8) W19(6.8,-6.8) W20(7.6,-6.8) Y1(-7.6,-7.6) Y2(-6.8,-7.6) Y3(-6,-7.6) Y4(-5.2,-7.6) Y5(-4.4,-7.6) Y6(-3.6,-7.6) Y7(-2.8,-7.6) Y8(-2,-7.6) Y9(-1.2,-7.6) Y10(-0.4,-7.6) Y11(0.4,-7.6) Y12(1.2,-7.6) Y13(2,-7.6) Y14(2.8,-7.6) Y15(3.6,-7.6) Y16(4.4,-7.6) Y17(5.2,-7.6) Y18(6,-7.6) Y19(6.8,-7.6) Y20(7.6,-7.6)
  silkscreen extent -9.27,-8.5 8.5,8.5, body extent -8.5,-8.5 8.5,8.5, height 1.51
Molex_0_MFG [mm]
  rect 0.8x1.6 smd paste+0 mask+0: 1(-1.25,2.9) 2(0,2.9) 3(1.25,2.9)
  rect 2.1x3 smd paste+0 mask+0: 4(-3.8,0) 5(3.8,0)
  silkscreen extent -4.35,-2.2 4.35,4.4, body extent -4.45,-2.1 4.45,3.1, height 3.6
Molex_53261-0671_0 [mm]
  rect 0.8x1.6 smd paste+0 mask+0: 1(-3.125,2.9) 2(-1.875,2.9) 3(-0.625,2.9) 4(0.625,2.9) 5(1.875,2.9) 6(3.125,2.9)
  rect 2.1x3 smd paste+0 mask+0: 7(-5.675,0) 8(5.675,0)
  silkscreen extent -6.12,-2.1 6.12,3.4, body extent -6.35,-2.09 6.3,3.11, height 3.4
Molex_53261-1571_0 [mm]
  rect 0.8x1.6 smd paste+0 mask+0: 1(-8.75,2.7) 2(-7.5,2.7) 3(-6.25,2.7) 4(-5,2.7) 5(-3.75,2.7) 6(-2.5,2.7) 7(-1.25,2.7) 8(0,2.7) 9(1.25,2.7) 10(2.5,2.7) 11(3.75,2.7) 12(5,2.7) 13(6.25,2.7) 14(7.5,2.7) 15(8.75,2.7)
  rect 2.1x3 smd paste+0 mask+0: 16(-11.3,-0.2) 17(11.3,-0.2)
  silkscreen extent -11.88,-2.2 11.88,4.37, body extent -12.45,-2.3 12.45,3.6, height 0.25
NXP-SOT363_N [mm] "SOT23, 6-Leads, Body 2.2x1.35mm, Pitch 0.65mm, IPC Medium Density"
  rect 0.55x0.35 smd: 1(-0.925,0.65) 2(-0.925,0) 3(-0.925,-0.65) 4(0.925,-0.65) 5(0.925,0) 6(0.925,0.65)
  silkscreen extent -1.05,-1.1 0.25,1.5, body extent -0.67,-1.1 0.67,1.1, height 1.1
SOT23-5 [mm]
  rect 1.1x0.65 smd: 1(-1.2,0.95) 2(-1.2,0) 3(-1.2,-0.95) 4(1.2,-0.95) 5(1.2,0.95)
  silkscreen extent -1.32,-1.55 0.25,1.95, body extent -1.5,-1.5 1.5,1.5, height 1.3

## Part data
FD1 FD2 FD3: "Fiducial for DB board variants"
FD4: "Fiducial 1.3mm"
M1 M2 M3 M4: "Mechanical Hole for DB board variants"
P1: "CONN STACKING 20POS SMD GOLD", Manufacturer=Samtec, Supplier Part Number 1=SAM9412-ND, ComponentLink1Description=https://www.digikey.com/product-detail/en/samtec-inc/FSI-110-03-G-D-AD/SAM9412-ND/6678149, ComponentLink1URL=https://www.digikey.com/product-detail/en/samtec-inc/FSI-110-03-G-D-AD/SAM9412-ND/6678149, ComponentLink2Description=https://br.mouser.com/ProductDetail/Samtec/FSI-110-03-G-D-AD?qs=sGAEpiMZZMvffgRu4KC1RxM6nKwEP14AvPoIU%2FGiIRnIunfAN0MvNQ%3D%3D, ComponentLink2URL=https://br.mouser.com/ProductDetail/Samtec/FSI-110-03-G-D-AD?qs=sGAEpiMZZMvffgRu4KC1RxM6nKwEP14AvPoIU%2FGiIRnIunfAN0MvNQ%3D%3D, ComponentLink3Description=http://www.samtec.com/ftppub/pdf/FSI_03.PDF?src-supplier=Avnet+Europe, ComponentLink3URL=http://www.samtec.com/ftppub/pdf/FSI_03.PDF?src-supplier=Avnet+Europe, Contact Material=Copper, Contact Plating=Gold, Gender=Male, Manufacturer Part Number=FSI-110-03-G-D-AD, Mount="Surface Mount", Number of Contacts=20, Number of Rows=2, Partnumber=FSI-110-03-G-D-AD, Pitch=1mm, Pricing 1="1=6.6, 10=6.325, 25=5.7752, 50=5.5, 100=5.225, 250=4.675, 500=4.4, 1000=3.85, 2500=3.6575 (USD)", Pricing 2="1=6.59, 10=5.5, 100=4.68, 250=4.17, 500=3.84, 1000=3.6 (USD)", Radiation Hardening=No, REACH SVHC="No SVHC", Stock 1=100, Stock 2=50, Supplier 1=Digi-Key, Supplier 2=Mouser, Supplier Part Number 2=200-FSI11003GDAD, Termination=Solder
U4 U4_1 U4_1_1 U4_1_2: "MOSFET 30V Vds 12V Vgs SC70-6 SOT-363-6", Manufacturer=Vishay, Category=MOSFET, Mount Type=SMD
U5: "SmartFusion2 SoC FPGA, ARM Cortex-M3, 10 K LUTs, 195 User I/O, Design Security, 0 to 85 degC, 400-Ball BGA", Manufacturer=Microsemi, ComponentLink1Description="Manufacturer URL", ComponentLink1URL=http://www.microsemi.com/, ComponentLink2Description=Datasheet, ComponentLink2URL=http://www.microsemi.com/document-portal/doc_download/130717-smartfusion2-datasheet, ComponentLink3Description="Package Specification", ComponentLink3URL=http://www.microsemi.com/document-portal/doc_download/131095-package-mechanical-drawings, DatasheetVersion="Rev. 5", DDR Controllers (Count x Width)=1x18, DDRIO (2.5V)=64, eNVM (K Bytes)=256, eSRAM (K Bytes)=64, eSRAM (K Bytes) Non SECDED=80, LSRAM 18K Blocks=21, Math Blocks (18x18)=22, Maximum Logic Elements=12,084, Mounting Technology="Surface Mount", MSIO (3.3V)=99, MSIOD (2.5V)=32, PackageDescription="400-Ball Very Fine Pitch Ball Grid Array, Body 17 x 17 mm, Pitch 0.8 mm", PackageReference=VF-400, PackageVersion="Rev. 48, 11/2013", Partnumber=M2S010-VF400, PLLs and CCCs=2, RoHS=FALSE, SERDES Lanes=4, Total RAM (K bits)=400, Total User I/O=195, uSRAM1K Blocks=22
U6: "IC REG BUCK ADJ 1.5A SOT23-5", Manufacturer="Texas Instruments", Category=Regulator, Mount Type=SMD
U? U?1 U?_1 U?_1_1 U?_1_2: "Overvoltage / Overcurrent Protection Controller, 2.5 to 80 V Vin, 8-pin SOT23 (TS8-8), -40 to 85 degC, Pb-Free, Mini Tape and Reel", Extended Temp="C, I, H", Manufacturer="Linear Technology", Power Good=yes, Active Limiting=no, Circuit Breaker Accuracy(%)=10, Circuit Breakers(#)=1, Circuit Breaker Threshold="50 mV", Code_JEDEC=MO-193, ComponentLink1Description="Manufacturer URL", ComponentLink1URL=http://www.linear.com/, ComponentLink2Description=Datasheet, ComponentLink2URL=http://cds.linear.com/docs/en/datasheet/436112fb.pdf, ComponentLink3Description="Package Specification", ComponentLink3URL=http://cds.linear.com/docs/en/packaging/SOT_8_05-08-1637.pdf, DatasheetVersion="Rev. B", Fast Comparator=no, Fault=no, Foldback=no, Mounting Technology="Surface Mount", PackageDescription="8-Pin Plastic TSOT-23, Body 2.9 x 1.63 mm, Pitch 0.65 mm", PackageReference=TS8-8, PackageVersion="Rev. A, 08/2010", Packing="Mini Tape and Reel", Partnumber=LTC4361ITS8-1#TRMPBF, Reset=no, RoHS=TRUE, Vin Range="2.5 to 80 V"

## Via types
v1: diameter 15, hole 8, Top-Outer-Layer (GND) to Bottom-Outer-Layer (GND), 301 vias

## Nets (pads, with @x,y where several pads share a name; then routed paths per layer and width w, separated by ;. In a path a pad name is that pad's centre, name@x,y a point inside that pad or via, vN(x,y) a via of type N, cw(c..) or ccw(c..) an arc to the next point about the centre after c; other vN are vias at no path point)
"ANTENNA VCC": P1.3
"BATTERY VCC": P1.5
CLK_EN: 
"D BOARD ADC0": P1.12
"D BOARD ADC1": P1.14
"D BOARD ADC2": P1.16
"D BOARD GPIO0": P1.7
"D BOARD GPIO1": P1.8
"D BOARD GPIO2": P1.9
"D BOARD GPIO3": P1.10
"D BOARD SPI CS0": P1.17
"D BOARD SPI CS1": P1.19
GND: M4.0 P1.2 P1.4 P1.6
"I2C2 SCL BUF": P1.20
"I2C2 SDA BUF": P1.18
MISO_EN: 
MOSI_EN: 
NetD1_1: 
NetJ_V1_1: 
NetJ_V2_1: 
NetJ_V3_1: 
NetR7_1: 
NetR12_1: 
"OBDH 3V3DVCC": P1.1
SPI_B\U\F\F\_CLK: P1.11
SPI_B\U\F\F\_MISO: P1.13
SPI_B\U\F\F\_MOSI: P1.15
SPI_BUFF_CLK: 
SPI_BUFF_MISO: 
SPI_BUFF_MOSI: 
pads on no net: Designator1.1 Designator1.2 Designator1.3 Designator1.4 Designator1.5 Designator3.1 Designator3.2 Designator3.3 Designator3.4 Designator3.5 Designator3.6 Designator3.7 Designator3.8 Designator5.1 Designator5.2 Designator5.3 Designator5.4 Designator5.5 Designator5.6 Designator5.7 Designator5.8 Designator5.9 Designator5.10 Designator5.11 Designator5.12 Designator5.13 Designator5.14 Designator5.15 Designator5.16 Designator5.17 Designator11.1 Designator11.2 Designator11.3 Designator11.4 Designator11.5 Designator11.6 Designator11.7 Designator11.8 Designator11.9 Designator11.10 Designator11.11 Designator11.12 Designator13.1 Designator13.2 Designator14.1 Designator14.2 Designator15.1 Designator15.2 Designator16.1 Designator16.2 Designator17.1 Designator17.2 Designator18.1 Designator18.2 Designator19.1 Designator19.2 Designator20.1 Designator20.2 Designator21.1 Designator21.2 Designator22.1 Designator22.2 Designator23.1 Designator23.2 Designator24.1 Designator24.2 Designator25.1 Designator25.2 Designator26.1 Designator26.2 Designator27.1 Designator27.2 Designator28.1 Designator28.2 Designator29.1 Designator29.2 Designator30.1 Designator30.2 Designator31.1 Designator31.2 Designator32.1 Designator32.2 Designator33.1 Designator33.2 Designator34.1 Designator34.2 Designator35.1 Designator35.2 Designator36.1 Designator36.2 Designator37.1 Designator37.2 Designator38.1 Designator38.2 Designator39.1 Designator39.2 Designator39.3 Designator39.4 Designator39.5 Designator39.6 Designator40.1 Designator40.2 Designator41.1 Designator41.2 Designator42.1 Designator42.2 Designator43.1 Designator43.2 Designator44.1 Designator44.2 Designator45.1 Designator45.2 Designator46.1 Designator46.2 Designator47.1 Designator47.2 Designator48.1 Designator48.2 Designator49.1 Designator49.2 Designator50.1 Designator50.2 Designator51.1 Designator51.2 Designator52.1 Designator52.2 Designator53.1 Designator53.2 Designator54.1 Designator54.2 Designator54_1.1 Designator54_1.2 Designator54_2.1 Designator54_2.2 Designator55.1 Designator55.2 Designator55_1.1 Designator55_1.2 Designator55_2.1 Designator55_2.2 FD1.1 FD2.1 FD3.1 FD4.FD0 M1.0 M2.0 M3.0 P1.AT U1.1 U1.2 U1.3 U1.4 U1.5 U1.6 U1.7 U1.8 U1.9 U1.10 U1.11 U1.12 U1.13 U1.14 U1.15 U1.16 U1.17 U1.18 U1.19 U1.20 U1.21 U1.22 U1.23 U1.24 U1.25 U1.26 U1.27 U1.28 U1.29 U1.30 U1.31 U1.32 U1.33 U1.34 U1.35 U1.36 U1.37 U1.38 U1.39 U1.40 U1.41 U1.42 U1.43 U1.44 U1.45 U1.46 U1.47 U1.48 U1.49 U1.50 U1.51 U1.52 U1.53 U1.54 U2.1 U2.2 U2.3 U2.4 U2.5 U2.6 U2.7 U2.8 U2.9 U2.10 U2.11 U2.12 U2.13 U2.14 U2.15 U2.16 U2.17 U2.18 U2.19 U2.20 U2.21 U2.22 U2.23 U2.24 U2.25 U2.26 U2.27 U2.28 U2.29 U2.30 U2.31 U2.32 U2.33 U2.34 U2.35 U2.36 U2.37 U2.38 U2.39 U2.40 U2.41 U2.42 U2.43 U2.44 U2.45 U2.46 U2.47 U2.48 U2.49 U2.50 U2.51 U2.52 U2.53 U2.54 U3.1 U3.2 U3.3 U3.4 U3.5 U3.6 U3.7 U3.8 U3.9 U3.10 U3.11 U3.12 U3.13 U3.14 U3.15 U3.16 U3.17 U3.18 U3.19 U3.20 U3.21 U3.22 U3.23 U3.24 U3.25 U3.26 U3.27 U3.28 U3.29 U3.30 U3.31 U3.32 U3.33 U3.34 U3.35 U3.36 U3.37 U3.38 U3.39 U3.40 U3.41 U3.42 U3.43 U3.44 U3.45 U3.46 U3.47 U3.48 U3.49 U3.50 U3.51 U3.52 U3.53 U3.54 U4.1 U4.2 U4.3 U4.4 U4.5 U4.6 U4_1.1 U4_1.2 U4_1.3 U4_1.4 U4_1.5 U4_1.6 U4_1_1.1 U4_1_1.2 U4_1_1.3 U4_1_1.4 U4_1_1.5 U4_1_1.6 U4_1_2.1 U4_1_2.2 U4_1_2.3 U4_1_2.4 U4_1_2.5 U4_1_2.6 U5.A1 U5.A2 U5.A3 U5.A4 U5.A5 U5.A6 U5.A7 U5.A8 U5.A9 U5.A10 U5.A11 U5.A12 U5.A13 U5.A14 U5.A15 U5.A16 U5.A17 U5.A18 U5.A19 U5.A20 U5.B1 U5.B2 U5.B3 U5.B4 U5.B5 U5.B6 U5.B7 U5.B8 U5.B9 U5.B10 U5.B11 U5.B12 U5.B13 U5.B14 U5.B15 U5.B16 U5.B17 U5.B18 U5.B19 U5.B20 U5.C1 U5.C2 U5.C3 U5.C4 U5.C5 U5.C6 U5.C7 U5.C8 U5.C9 U5.C10 U5.C11 U5.C12 U5.C13 U5.C14 U5.C15 U5.C16 U5.C17 U5.C18 U5.C19 U5.C20 U5.D1 U5.D2 U5.D3 U5.D4 U5.D5 U5.D6 U5.D7 U5.D8 U5.D9 U5.D10 U5.D11 U5.D12 U5.D13 U5.D14 U5.D15 U5.D16 U5.D17 U5.D18 U5.D19 U5.D20 U5.E1 U5.E2 U5.E3 U5.E4 U5.E5 U5.E6 U5.E7 U5.E8 U5.E9 U5.E10 U5.E11 U5.E12 U5.E13 U5.E14 U5.E15 U5.E16 U5.E17 U5.E18 U5.E19 U5.E20 U5.F1 U5.F2 U5.F3 U5.F4 U5.F5 U5.F6 U5.F7 U5.F8 U5.F9 U5.F10 U5.F11 U5.F12 U5.F13 U5.F14 U5.F15 U5.F16 U5.F17 U5.F18 U5.F19 U5.F20 U5.G1 U5.G2 U5.G3 U5.G4 U5.G5 U5.G6 U5.G7 U5.G8 U5.G9 U5.G10 U5.G11 U5.G12 U5.G13 U5.G14 U5.G15 U5.G16 U5.G17 U5.G18 U5.G19 U5.G20 U5.H1 U5.H2 U5.H3 U5.H4 U5.H5 U5.H6 U5.H7 U5.H8 U5.H9 U5.H10 U5.H11 U5.H12 U5.H13 U5.H14 U5.H15 U5.H16 U5.H17 U5.H18 U5.H19 U5.H20 U5.J1 U5.J2 U5.J3 U5.J4 U5.J5 U5.J6 U5.J7 U5.J8 U5.J9 U5.J10 U5.J11 U5.J12 U5.J13 U5.J14 U5.J15 U5.J16 U5.J17 U5.J18 U5.J19 U5.J20 U5.K1 U5.K2 U5.K3 U5.K4 U5.K5 U5.K6 U5.K7 U5.K8 U5.K9 U5.K10 U5.K11 U5.K12 U5.K13 U5.K14 U5.K15 U5.K16 U5.K17 U5.K18 U5.K19 U5.K20 U5.L1 U5.L2 U5.L3 U5.L4 U5.L5 U5.L6 U5.L7 U5.L8 U5.L9 U5.L10 U5.L11 U5.L12 U5.L13 U5.L14 U5.L15 U5.L16 U5.L17 U5.L18 U5.L19 U5.L20 U5.M1 U5.M2 U5.M3 U5.M4 U5.M5 U5.M6 U5.M7 U5.M8 U5.M9 U5.M10 U5.M11 U5.M12 U5.M13 U5.M14 U5.M15 U5.M16 U5.M17 U5.M18 U5.M19 U5.M20 U5.N1 U5.N2 U5.N3 U5.N4 U5.N5 U5.N6 U5.N7 U5.N8 U5.N9 U5.N10 U5.N11 U5.N12 U5.N13 U5.N14 U5.N15 U5.N16 U5.N17 U5.N18 U5.N19 U5.N20 U5.P1 U5.P2 U5.P3 U5.P4 U5.P5 U5.P6 U5.P7 U5.P8 U5.P9 U5.P10 U5.P11 U5.P12 U5.P13 U5.P14 U5.P15 U5.P16 U5.P17 U5.P18 U5.P19 U5.P20 U5.R1 U5.R2 U5.R3 U5.R4 U5.R5 U5.R6 U5.R7 U5.R8 U5.R9 U5.R10 U5.R11 U5.R12 U5.R13 U5.R14 U5.R15 U5.R16 U5.R17 U5.R18 U5.R19 U5.R20 U5.T1 U5.T2 U5.T3 U5.T4 U5.T5 U5.T6 U5.T7 U5.T8 U5.T9 U5.T10 U5.T11 U5.T12 U5.T13 U5.T14 U5.T15 U5.T16 U5.T17 U5.T18 U5.T19 U5.T20 U5.U1 U5.U2 U5.U3 U5.U4 U5.U5 U5.U6 U5.U7 U5.U8 U5.U9 U5.U10 U5.U11 U5.U12 U5.U13 U5.U14 U5.U15 U5.U16 U5.U17 U5.U18 U5.U19 U5.U20 U5.V1 U5.V2 U5.V3 U5.V4 U5.V5 U5.V6 U5.V7 U5.V8 U5.V9 U5.V10 U5.V11 U5.V12 U5.V13 U5.V14 U5.V15 U5.V16 U5.V17 U5.V18 U5.V19 U5.V20 U5.W1 U5.W2 U5.W3 U5.W4 U5.W5 U5.W6 U5.W7 U5.W8 U5.W9 U5.W10 U5.W11 U5.W12 U5.W13 U5.W14 U5.W15 U5.W16 U5.W17 U5.W18 U5.W19 U5.W20 U5.Y1 U5.Y2 U5.Y3 U5.Y4 U5.Y5 U5.Y6 U5.Y7 U5.Y8 U5.Y9 U5.Y10 U5.Y11 U5.Y12 U5.Y13 U5.Y14 U5.Y15 U5.Y16 U5.Y17 U5.Y18 U5.Y19 U5.Y20 U6.1 U6.2 U6.3 U6.4 U6.5 U?1.1 U?1.2 U?1.3 U?1.4 U?1.5 U?1.6 U?1.7 U?1.8 U?.1 U?.2 U?.3 U?.4 U?.5 U?.6 U?.7 U?.8 U?_1.1 U?_1.2 U?_1.3 U?_1.4 U?_1.5 U?_1.6 U?_1.7 U?_1.8 U?_1_1.1 U?_1_1.2 U?_1_1.3 U?_1_1.4 U?_1_1.5 U?_1_1.6 U?_1_1.7 U?_1_1.8 U?_1_2.1 U?_1_2.2 U?_1_2.3 U?_1_2.4 U?_1_2.5 U?_1_2.6 U?_1_2.7 U?_1_2.8